# Altium PCB Peripheral_PCB.PcbDoc
Units mil, origin at the board's own origin, x right, y up, seen from the top; angles counter-clockwise.
Board outline 5140 x 3120 mil, 2 copper layers (Top Layer, Bottom Layer), stack 5.6 mil thick; 54 components, 55 nets, 284 pads, 5 vias.
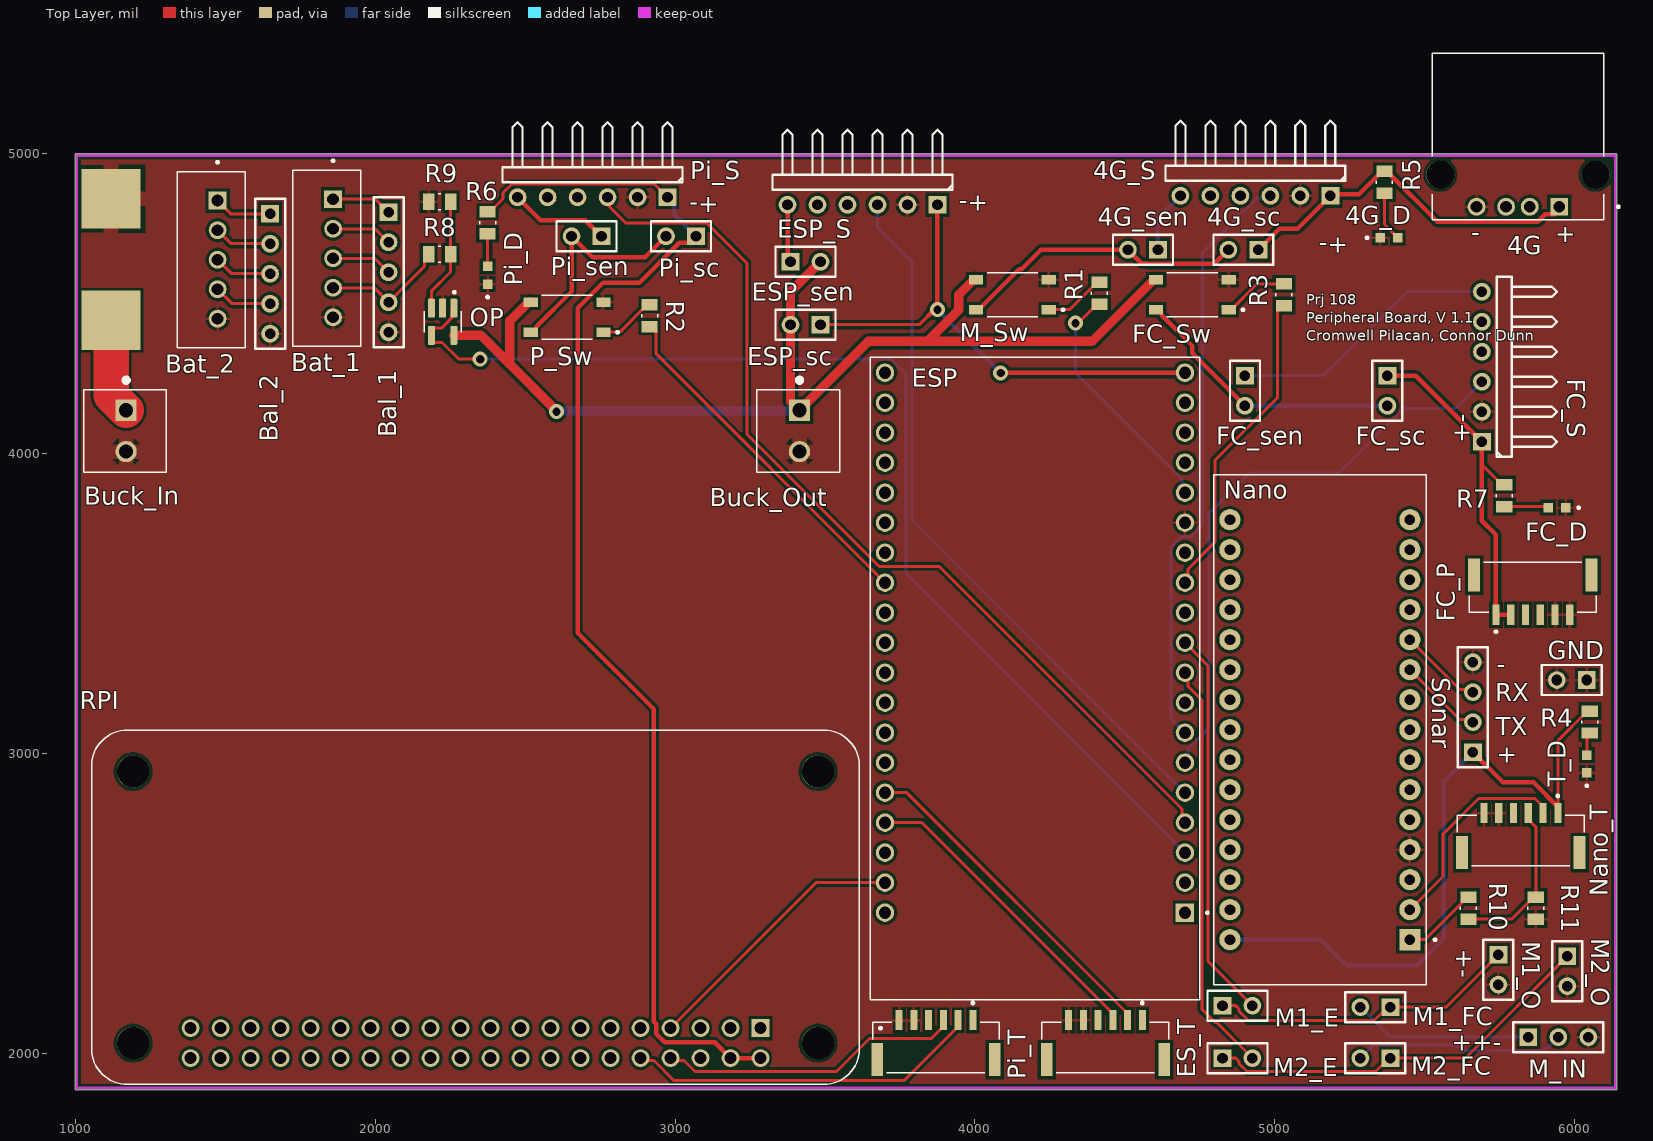
[diagram p0: Top Layer view]
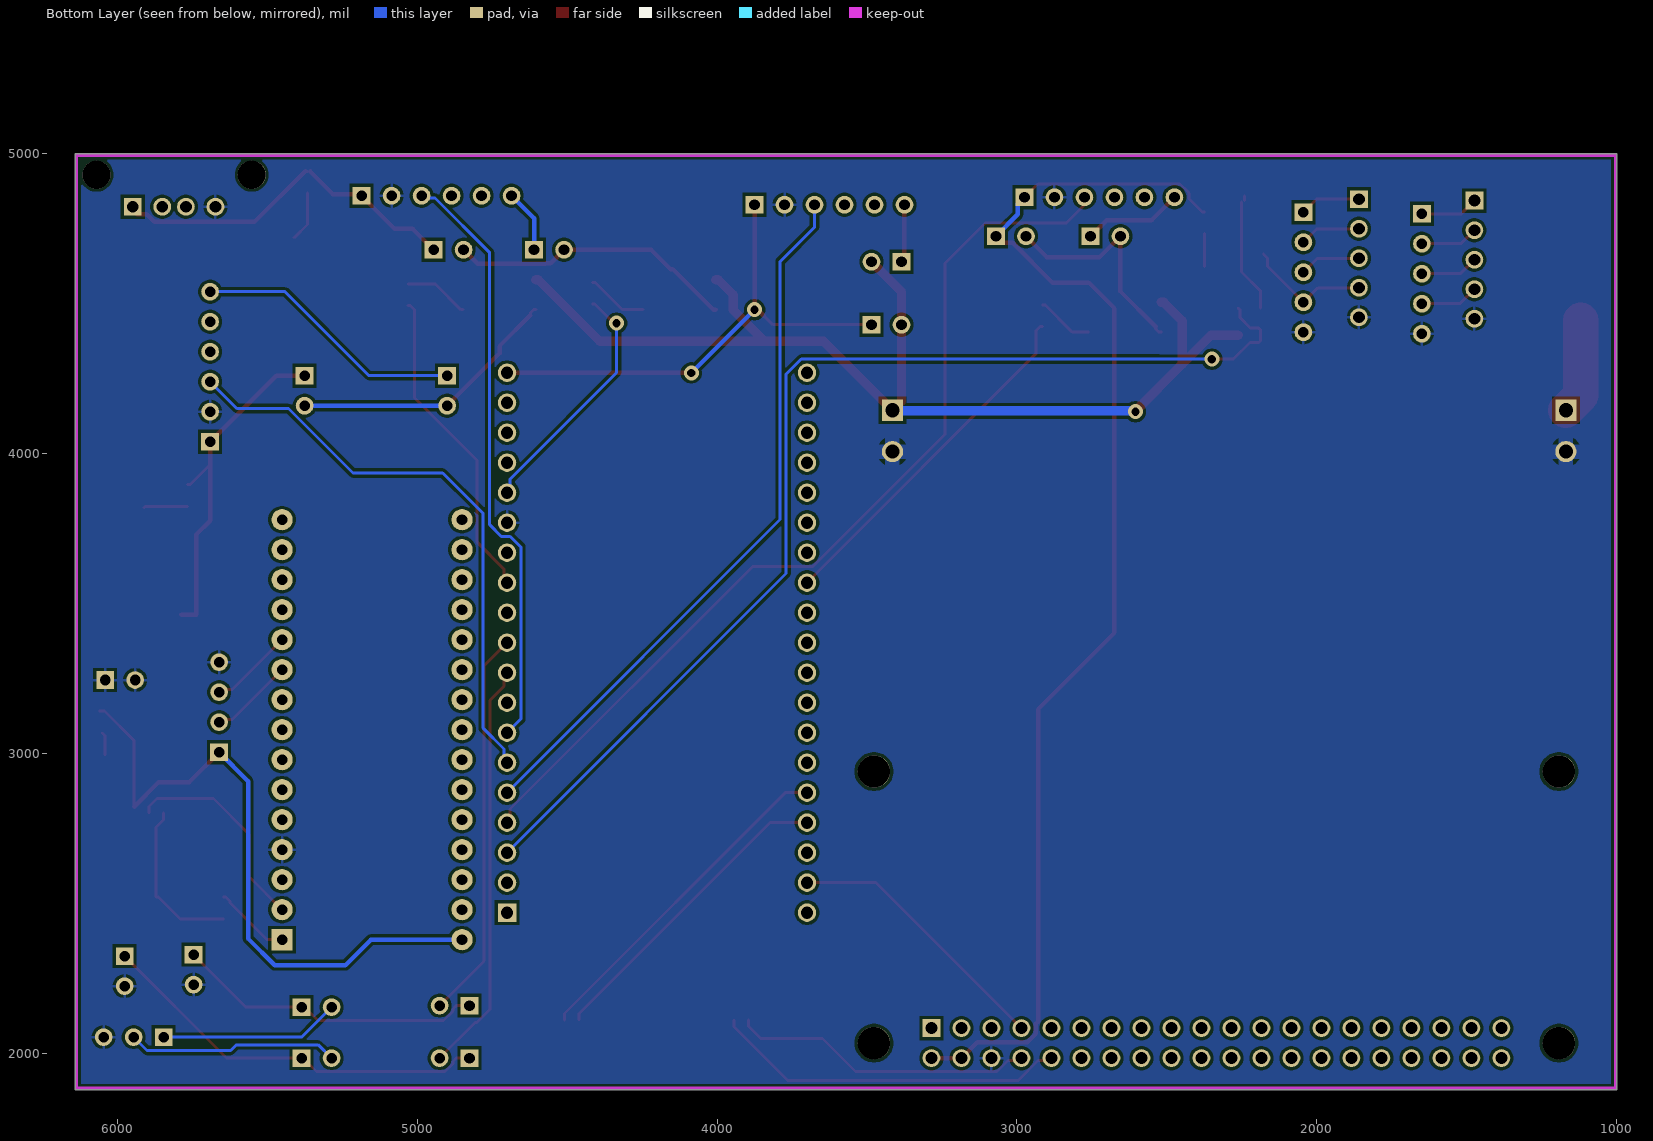
[diagram p1: Bottom Layer view, seen from below]
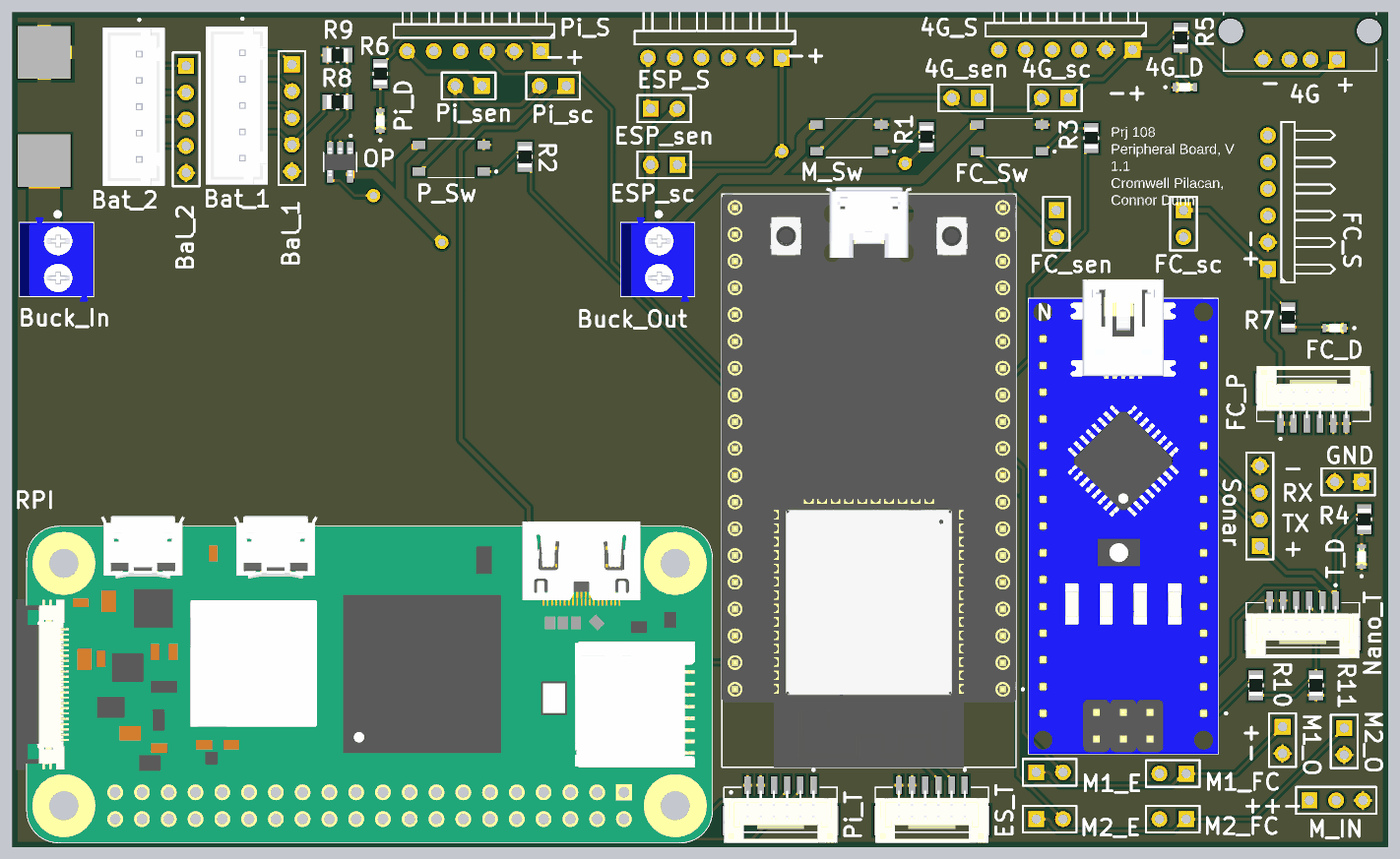
[diagram p2: 3D render of the assembled board from above, using the file's embedded part models]

## Layer stack, top to bottom
Top Solder: solder mask 0.4, Solder Resist, Dk 3.5
Top Layer: signal copper 1.4
Dielectric 3: prepreg 2.8, PP-006, Dk 4.1
Bottom Layer: signal copper 1.4
Bottom Solder: solder mask 0.4, Solder Resist, Dk 3.5

## Board outline
1000,1880 6140,1880 6140,5000 1000,5000

## Design rules (kind name [scope] priority, off if disabled: settings)
Clearance [All] p1: gap=10 ignorepadtopadclearanceinfootprint=FALSE
PlaneConnect [InNet('GND')] p1: planeconnectstyle=Relief reliefexpansion=50 reliefentries=4 reliefconductorwidth=10 reliefairgap=15
PolygonConnect [All] p1: connectstyle=Relief reliefconductorwidth=10 reliefentries=4 polygonreliefangle="90 Angle" airgapwidth=10
RoutingVias [All] p1: holewidth=28 width=50 viastyle="Through Hole" minholewidth=28 minwidth=50 maxholewidth=28 maxwidth=50
SolderMaskExpansion [All] p1: expansion=4 istentingtop=FALSE
SupplyNets "Schematic Supply Nets_1" [InNet('GND')] p1: voltage=0.000
SupplyNets "Schematic Supply Nets" [InNet('VBATT')] p2: voltage=0.000
Width [All] p1: maxlimit=118.11 minlimit=10 preferedwidth=10 bottomlayer_maxwidth=31.5 minimp=50.000000 maximp=50.000000 favimp=50.000000
29 further rules are at their usual default settings.

## Components (designator, comment, footprint, x,y, rotation, side; value= is the part's Value field where it differs from the comment)
4G "USB-A1HSW6" OST_USB-A1HSW6 5810,4930 r180 top
4G_D "SM0603UYC" LED_SM0603UYC 5380,4720 r0 top
4G_S "Header 6H" HDR1X6H 5185,4860 r180 top
4G_sc "Header 2" HDR1X2 4945,4680 r180 top
4G_sen "Header 2" HDR1X2 4610,4680 r180 top
Bal_1 "Header 5" HDR1X5 2045,4805 r270 top
Bal_2 "Header 5" HDR1X5 1650,4800 r270 top
Bat_1 "B5B-XH-A" JST_B5B-XH-A 1839.33,4651.57 r90 top
Bat_2 "B5B-XH-A" JST_B5B-XH-A 1454.33,4646.85 r90 top
Buck_In "1776275-2" TE_1776275-2 1170,4145 r270 top (schematic designator Buck_IN)
Buck_Out "1776275-2" TE_1776275-2 3415,4145 r270 top (schematic designator Buck_OUT)
ES_T "BM06B-GHS-TBT(LF)(SN)(N)" JST_BM06B-GHS-TBT(LF)(SN)(N) 4435,1980 r0 top
ESP "ESP32-DEVKITC-32D" MODULE_ESP32-DEVKITC-32D 4200,3247.95 r180 top
ESP_S "Header 6H" HDR1X6H 3875,4830 r180 top
ESP_sc "Header 2" HDR1X2 3485,4430 r180 top
ESP_sen "Header 2" HDR1X2 3385,4640 r0 top
FC_D "SM0603UYC" LED_SM0603UYC 5940,3820 r180 top
FC_P "BM06B-GHS-TBT(LF)(SN)(N)" JST_BM06B-GHS-TBT(LF)(SN)(N) 5860,3595 r180 top
FC_S "Header 6H" HDR1X6H 5690,4040 r90 top
FC_sc "Header 2" HDR1X2 5375,4260 r270 top
FC_sen "Header 2" HDR1X2 4900,4260 r270 top
FC_Sw "G3VM-61VY3" RELAY_G3VM-61VY3 4725,4530 r180 top
GND "Header 2" HDR1X2 6040,3245.47 r180 top
M1_E "Header 2" HDR1X2 4825,2160 r0 top
M1_FC "Header 2" HDR1X2 5385,2155 r180 top
M1_O "Header 2" HDR1X2 5745,2330 r270 top
M2_E "Header 2" HDR1X2 4825,1985 r0 top
M2_FC "Header 2" HDR1X2 5385,1985 r180 top
M2_O "Header 2" HDR1X2 5975,2325 r270 top
M_IN "Header 3" HDR1X3 5845,2055 r0 top
M_Sw "G3VM-61VY3" RELAY_G3VM-61VY3 4125,4530 r180 top
Nano "ARDUINO_NANO" MODULE_ARDUINO_NANO 5150,3080 r180 top
Nano_T "BM06B-GHS-TBT(LF)(SN)(N)" JST_BM06B-GHS-TBT(LF)(SN)(N) 5820,2670 r0 top
OP "MCP6001T-I/OT" SOT95P270X145-5N 2225,4440 r270 top
P_Sw "G3VM-61VY3" RELAY_G3VM-61VY3 2640,4455 r180 top
Pi_D "SM0603UYC" LED_SM0603UYC 2375,4595 r90 top
Pi_S "Header 6H" HDR1X6H 2975,4855 r180 top
Pi_sc "Header 2" HDR1X2 3070,4725 r180 top
Pi_sen "Header 2" HDR1X2 2755,4725 r180 top
Pi_T "BM06B-GHS-TBT(LF)(SN)(N)" JST_BM06B-GHS-TBT(LF)(SN)(N) 3870,1980 r0 top
R1 "CR0805AJ/-000EAS" RESC2012X60N 4415,4535 r270 top
R2 "CR0805AJ/-000EAS" RESC2012X60N 2915,4460 r270 top
R3 "CR0805AJ/-000EAS" RESC2012X60N 5030,4530 r270 top
R4 "CR0805AJ/-000EAS" RESC2012X60N 6050,3105.47 r90 top
R5 "CR0805AJ/-000EAS" RESC2012X60N 5365,4905 r90 top
R6 "CR0805AJ/-000EAS" RESC2012X60N 2375,4770 r90 top
R7 "CR0805AJ/-000EAS" RESC2012X60N 5765,3860 r90 top
R8 "CR0805AJ/-000EAS" RESC2012X60N 2215,4665 r0 top
R9 "CR0805AJ/-000EAS" RESC2012X60N 2215,4840 r180 top
R10 "CR0805AJ/-000EAS" RESC2012X60N 5645,2485 r270 top
R11 "CR0805AJ/-000EAS" RESC2012X60N 5870,2485 r270 top
RPI "RASPBERRY_PI_ZERO_2_W" MODULE_RASPBERRY_PI_ZERO_2_W 2335,2487.76 r180 top
Sonar "Header 4" HDR1X4 5660,3005 r90 top
T_D "SM0603UYC" LED_SM0603UYC 6040,2965.47 r90 top

## Footprints (in the part's own frame and the unit in brackets; to place one, negate y for a bottom-side part, rotate by r counter-clockwise, add the part's x,y. Pads: shape width x height; smd on the part's side, far side on the other; paste and mask are expansions set on the pad)
HDR1X2 [mm] "Connector; Header; 2 Position"
  rect 1.5x1.5 hole 0.9: 1(0,0)
  round 1.5 hole 0.9: 2(2.54,0)
  silkscreen extent -1.27,-1.27 3.81,1.27
HDR1X3 [mm] "Connector; Header; 3 Position"
  rect 1.5x1.5 hole 0.9: 1(0,0)
  round 1.5 hole 0.9: 2(2.54,0) 3(5.08,0)
  silkscreen extent -1.27,-1.27 6.35,1.27
HDR1X4 [mm] "Connector; Header; 4 Position"
  rect 1.5x1.5 hole 0.9: 1(0,0)
  round 1.5 hole 0.9: 2(2.54,0) 3(5.08,0) 4(7.62,0)
  silkscreen extent -1.27,-1.27 8.89,1.27
HDR1X5 [mm] "Connector; Header; 5 Position"
  rect 1.5x1.5 hole 0.9: 1(0,0)
  round 1.5 hole 0.9: 2(2.54,0) 3(5.08,0) 4(7.62,0) 5(10.16,0)
  silkscreen extent -1.27,-1.27 11.43,1.27
HDR1X6H [mm] "Connector; Header; 6 Position; Right Angle"
  rect 1.5x1.5 hole 0.9: 1(0,0)
  round 1.5 hole 0.9: 2(2.54,0) 3(5.08,0) 4(7.62,0) 5(10.16,0) 6(12.7,0)
  silkscreen extent -1.27,-6.35 13.97,-1.27
JST_B5B-XH-A [mm]
  rect 1.508x1.508 / inner round 1.508 / far side rect 1.508x1.508 hole 1: 1(5,-0.525)
  round 1.508 hole 1: 2(2.5,-0.525) 3(0,-0.525) 4(-2.5,-0.525) 5(-5,-0.525)
  silkscreen extent -7.45,-2.88 8.35,2.88, body extent -7.45,-2.88 7.45,2.88, height 7
JST_BM06B-GHS-TBT(LF)(SN)(N) [mm]
  rect 0.6x1.7 smd: 1(3.125,3.35) 2(1.875,3.35) 3(0.625,3.35) 4(-0.625,3.35) 5(-1.875,3.35) 6(-3.125,3.35)
  rect 1x2.8 smd: S1(-4.975,0) S2(4.975,0)
  silkscreen extent -5.38,-1.1 5.38,4.9, body extent -5.38,-2.12 5.38,2.83, height 4.15
LED_SM0603UYC [mm]
  rect 0.8x0.8 smd: A(0.75,0) C(-0.75,0)
  silkscreen extent -1.95,-0.1 -1.75,0.1, body extent -0.8,-0.4 0.8,0.4, height 0.6
MODULE_ARDUINO_NANO [mm]
  rect 1.8x1.8 / inner round 1.8 / far side rect 1.8x1.8 hole 0.9: 1(-7.62,17.78)
  round 1.8 hole 0.9: 2(-7.62,15.24) 3(-7.62,12.7) 4(-7.62,10.16) 5(-7.62,7.62) 6(-7.62,5.08) 7(-7.62,2.54) 8(-7.62,0) 9(-7.62,-2.54) 10(-7.62,-5.08) 11(-7.62,-7.62) 12(-7.62,-10.16) 13(-7.62,-12.7) 14(-7.62,-15.24) 15(-7.62,-17.78) 16(7.62,-17.78) 17(7.62,-15.24) 18(7.62,-12.7) 19(7.62,-10.16) 20(7.62,-7.62) 21(7.62,-5.08) 22(7.62,-2.54) 23(7.62,0) 24(7.62,2.54) 25(7.62,5.08) 26(7.62,7.62) 27(7.62,10.16) 28(7.62,12.7) 29(7.62,15.24) 30(7.62,17.78)
  silkscreen extent -9.85,-21.6 9,21.6, body extent -9,-23.4 9,21.6, height 12.6
MODULE_ESP32-DEVKITC-32D [mm]
  rect 1.56x1.56 / inner round 1.56 / far side rect 1.56x1.56 hole 1.04: J2-1(-12.7,19.76)
  round 1.56 hole 1.04: J2-2(-12.7,17.22) J2-3(-12.7,14.68) J2-4(-12.7,12.14) J2-5(-12.7,9.6) J2-6(-12.7,7.06) J2-7(-12.7,4.52) J2-8(-12.7,1.98) J2-9(-12.7,-0.56) J2-10(-12.7,-3.1) J2-11(-12.7,-5.64) J2-12(-12.7,-8.18) J2-13(-12.7,-10.72) J2-14(-12.7,-13.26) J2-15(-12.7,-15.8) J2-16(-12.7,-18.34) J2-17(-12.7,-20.88) J2-18(-12.7,-23.42) J2-19(-12.7,-25.96) J3-1(12.7,19.76) J3-2(12.7,17.22) J3-3(12.7,14.68) J3-4(12.7,12.14) J3-5(12.7,9.6) J3-6(12.7,7.06) J3-7(12.7,4.52) J3-8(12.7,1.98) J3-9(12.7,-0.56) J3-10(12.7,-3.1) J3-11(12.7,-5.64) J3-12(12.7,-8.18) J3-13(12.7,-10.72) J3-14(12.7,-13.26) J3-15(12.7,-15.8) J3-16(12.7,-18.34) J3-17(12.7,-20.88) J3-18(12.7,-23.42) J3-19(12.7,-25.96)
  silkscreen extent -14.7,-27.25 13.95,27.15, body extent -13.97,-27.9 13.97,27.2, height 6.69
MODULE_RASPBERRY_PI_ZERO_2_W [mm]
  rect 1.508x1.508 / inner round 1.508 / far side rect 1.508x1.508 hole 1: 1(-24.13,10.23)
  round 1.508 hole 1: 2(-24.13,12.77) 3(-21.59,10.23) 4(-21.59,12.77) 5(-19.05,10.23) 6(-19.05,12.77) 7(-16.51,10.23) 8(-16.51,12.77) 9(-13.97,10.23) 10(-13.97,12.77) 11(-11.43,10.23) 12(-11.43,12.77) 13(-8.89,10.23) 14(-8.89,12.77) 15(-6.35,10.23) 16(-6.35,12.77) 17(-3.81,10.23) 18(-3.81,12.77) 19(-1.27,10.23) 20(-1.27,12.77) 21(1.27,10.23) 22(1.27,12.77) 23(3.81,10.23) 24(3.81,12.77) 25(6.35,10.23) 26(6.35,12.77) 27(8.89,10.23) 28(8.89,12.77) 29(11.43,10.23) 30(11.43,12.77) 31(13.97,10.23) 32(13.97,12.77) 33(16.51,10.23) 34(16.51,12.77) 35(19.05,10.23) 36(19.05,12.77) 37(21.59,10.23) 38(21.59,12.77) 39(24.13,10.23) 40(24.13,12.77)
  round 2.75 hole 2.75 unplated: ""(-29,-11.5) ""(-29,11.5) ""(29,-11.5) ""(29,11.5)
  silkscreen extent -34.39,-15 32.5,15, body extent -32.5,-16 33.5,15, height 4.57
OST_USB-A1HSW6 [mm]
  rect 1.508x1.508 / inner round 1.508 / far side rect 1.508x1.508 hole 1: 1(-3.5,2.71)
  round 1.508 hole 1: 2(-1,2.71) 3(1,2.71) 4(3.5,2.71)
  round 2.38 hole 2.38 unplated: ""(-6.57,0) ""(6.57,0)
  silkscreen extent -8.61,-10.3 7.25,3.8
RELAY_G3VM-61VY3 [mm]
  rect 1.2x0.8 smd: 1(-3.075,1.27) 2(-3.075,-1.27) 3(3.075,-1.27) 4(3.075,1.27)
  silkscreen extent -4.38,-1.85 2.15,1.85
RESC2012X60N [mm]
  rect 0.97x1.38 smd: 1(-0.93,0) 2(0.93,0)
  silkscreen extent -0.12,-0.68 0.12,0.68, body extent -1,-0.63 1,0.63, height 0.6
SOT95P270X145-5N [mm]
  rrect25% 1.61x0.59 smd: 1(-1.145,0.95) 2(-1.145,0) 3(-1.145,-0.95) 4(1.145,-0.95) 5(1.145,0.95)
  silkscreen extent -2.6,-1.57 0.9,1.57, body extent -1.35,-1.45 1.35,1.45, height 1.45
TE_1776275-2 [mm]
  rect 1.8x1.8 / inner round 1.8 / far side rect 1.8x1.8 hole 1.2: 1(0,0)
  round 1.8 hole 1.2: 2(3.5,0)
  silkscreen extent -2.74,-3.6 5.25,3.4, body extent -2.25,-3.6 5.75,3.4, height 8.3

## Part data
4G FC_Sw M_Sw P_Sw: Package=None, Availability=Unavailable, Price=None
  4G: MF="{'manufacturer': u'On Shore Technology Inc.'}", MP=USB-A1HSW6
  FC_Sw M_Sw P_Sw: MP=G3VM-61VY3
4G_D FC_D Pi_D T_D: "LED SMD 0603 Ultra Yellow 593nm 70mcd Water Clear Lens 130 Deg Viewing Angle", Package="0603 Bivar", Check_prices=https://www.snapeda.com/parts/SM0603UYC/Bivar/view-part/?ref=eda, MF=Bivar, MP=SM0603UYC, SnapEDA_Link=https://www.snapeda.com/parts/SM0603UYC/Bivar/view-part/?ref=snap
4G_S ESP_S FC_S Pi_S: "Header, 6-Pin, Right Angle", LatestRevisionDate=17-Jul-2002, LatestRevisionNote="Re-released for DXP Platform.", Publisher="Altium Limited"
4G_sc 4G_sen ESP_sc ESP_sen FC_sc FC_sen GND M1_E M1_FC M1_O M2_E M2_FC M2_O Pi_sc Pi_sen: "Header, 2-Pin", LatestRevisionDate=17-Jul-2002, LatestRevisionNote="Re-released for DXP Platform.", Publisher="Altium Limited"
Bal_1 Bal_2: "Header, 5-Pin", LatestRevisionDate=17-Jul-2002, LatestRevisionNote="Re-released for DXP Platform.", Publisher="Altium Limited"
Bat_1 Bat_2: "Connector Header Through Hole 5 position 0.098 (2.50mm)", Package=None, Check_prices=https://www.snapeda.com/parts/B5B-XH-A/JST+Sales+America+Inc./view-part/?ref=eda, MF="JST Sales", MP=B5B-XH-A, SnapEDA_Link=https://www.snapeda.com/parts/B5B-XH-A/JST+Sales+America+Inc./view-part/?ref=snap
Buck_In Buck_Out: "2 Position Wire to Board Terminal Block Horizontal with Board 0.138\" (3.50mm) Through Hole", Package=None, Availability=Unavailable, Check_prices=https://www.snapeda.com/parts/1776275-2/TE+Connectivity+AMP+Connectors/view-part/?ref=eda, MF="TE Connectivity", MP=1776275-2, Price=None, SnapEDA_Link=https://www.snapeda.com/parts/1776275-2/TE+Connectivity+AMP+Connectors/view-part/?ref=snap
ES_T FC_P Nano_T Pi_T: "Connector Header Surface Mount 6 position 0.049 (1.25mm)", Package=None, Check_prices=https://www.snapeda.com/parts/BM06B-GHS-TBT(LF)(SN)(N)/JST/view-part/?ref=eda, MF="JST Sales", MP=BM06B-GHS-TBT(LF)(SN)(N), SnapEDA_Link=https://www.snapeda.com/parts/BM06B-GHS-TBT(LF)(SN)(N)/JST/view-part/?ref=snap
ESP: "WiFi Development Tools (802.11) ESP32 General Development Kit, ESP32-WROOM-32D on the board", Package=None, Check_prices=https://www.snapeda.com/parts/ESP32-DEVKITC-32D/Espressif+Systems/view-part/?ref=eda, MF="Espressif Systems", MP=ESP32-DEVKITC-32D, SnapEDA_Link=https://www.snapeda.com/parts/ESP32-DEVKITC-32D/Espressif+Systems/view-part/?ref=snap
M_IN: "Header, 3-Pin", LatestRevisionDate=17-Jul-2002, LatestRevisionNote="Re-released for DXP Platform.", Publisher="Altium Limited"
Nano: "Small, complete, and breadboard-friendly board based on the ATmega328 (Arduino Nano 3.x)", Package="Non-Standard Arduino", Check_prices=https://www.snapeda.com/parts/Arduino%20Nano/Arduino/view-part/?ref=eda, MF=Arduino, MP="Arduino Nano", SnapEDA_Link=https://www.snapeda.com/parts/Arduino%20Nano/Arduino/view-part/?ref=snap
OP: "Microchip Op Amp, 1MHz CMOS, Rail to Rail, 3 V, 5 V, 5-Pin SOT-23", Package="SOT-23 Microchip", Check_prices=https://www.snapeda.com/parts/MCP6001T-I/OT/Microchip/view-part/?ref=eda, MF=Microchip, MP=MCP6001T-I/OT, SnapEDA_Link=https://www.snapeda.com/parts/MCP6001T-I/OT/Microchip/view-part/?ref=snap
R1 R2 R3 R4 R5 R6 R7 R8 R9 R10 R11: "Resistor, AS 0805 0R Jumper 125mW, AEC-Q, Anti-Sulfur", Package="0805 Bourns", Check_prices=https://www.snapeda.com/parts/CR0805AJ/-000EAS/Bourns/view-part/?ref=eda, MF=Bourns, MP=CR0805AJ/-000EAS, SnapEDA_Link=https://www.snapeda.com/parts/CR0805AJ/-000EAS/Bourns/view-part/?ref=snap
RPI: "At the heart of Raspberry Pi Zero 2 W is RP3A0, a custom-built system-in-package designed by Raspberry Pi in the UK.", Package=None, Check_prices=https://www.snapeda.com/parts/RASPBERRY%20PI%20ZERO%202%20W/Raspberry+Pi/view-part/?ref=eda, MF="Raspberry Pi", MP="RASPBERRY PI ZERO 2 W", SnapEDA_Link=https://www.snapeda.com/parts/RASPBERRY%20PI%20ZERO%202%20W/Raspberry+Pi/view-part/?ref=snap
Sonar: "Header, 4-Pin", LatestRevisionDate=17-Jul-2002, LatestRevisionNote="Re-released for DXP Platform.", Publisher="Altium Limited"

## Free pads (board coordinates)
  rect 196.85x196.85 smd mask+4: ""(1120,4445) ""(1120,4850)

## Via types
v1: diameter 50, hole 28, Top Layer to Bottom Layer, 5 vias

## Nets (pads, with @x,y where several pads share a name; then routed paths per layer and width w, separated by ;. In a path a pad name is that pad's centre, name@x,y a point inside that pad or via, vN(x,y) a via of type N, cw(c..) or ccw(c..) an arc to the next point about the centre after c; other vN are vias at no path point)
4G_5V: 4G.1 4G_S.1 4G_sc.1 R5.2 | length 1199.8
  Top Layer w10: R5.2 R5.2@5373.07,4941.61
  Top Layer w15: 4G_sc.1 5015,4750 5075,4750 4G_S.1 5190,4865 5280.31,4865 R5.2@5356.93,4941.61 ; R5.2@5373.07,4941.61 5541.87,4772.81 5876.12,4772.81 5901.12,4797.81 5932.81,4797.81 4G.1@5955,4820
4G_ADC: 4G_S.3 ESP.J2-7 | length 1984.8
  Bottom Layer w10: ESP.J2-7 4654.29,3115.71 4654.29,3688.93 4689.65,3724.29 4718.93,3724.29 4757.98,3763.34 4757.98,4670.01 4940.47,4852.5 4977.5,4852.5 4G_S.3
4G_jump: 4G_sc.2 4G_sen.2 M_Sw.4 | length 962.9
  Top Layer w15: M_Sw.4 4011.81,4480 4146.81,4615 4155,4615 4220,4680 4G_sen.2 4554.53,4635.47 4570.72,4635.47 4573.22,4632.97 4797.97,4632.97 4G_sc.2
4G_sense: 4G_S.6 4G_sen.1 | length 211.1
  Bottom Layer w15: 4G_sen.1 4610,4785 4G_S.6
5V: Buck_Out.1 ESP_sc.2 ESP_sen.2 FC_Sw.3 M_Sw.3 OP.5 P_Sw.3 | length 3696.4
  Top Layer w10: Buck_Out.1@3385,4175 Buck_Out.1
  Top Layer w31.5: OP.5 2352.64,4394.92 2448.78,4298.78 ; P_Sw.3 2511.06,4505 2448.78,4442.72 2448.78,4298.78 ; v1(2605,4140) 2605,4142.56 2448.78,4298.78 ; Buck_Out.1@3385,4175 ESP_sc.2 3385,4540 ESP_sen.2 ; Buck_Out.1 3645,4375 3841.77,4375 ; M_Sw.3 3996.06,4580 3946.04,4529.98 3946.04,4479.27 3841.77,4375 ; FC_Sw.3 4596.06,4580 4391.06,4375 3841.77,4375
  Bottom Layer w31.5: v1(2605,4140) 2607.5,4142.5 3412.5,4142.5 Buck_Out.1
A_Rx: Nano.2 Nano_T.2 | length 712.8
  Top Layer w10: Nano.2 5560.3,2590.3 5560.3,2731.71 5678.94,2850.35 5867.01,2850.35 5893.82,2823.54 Nano_T.2
A_Tx: Nano_T.3 R10.2 R11.1 | length 546.1
  Top Layer w10: R10.2 5788.7,2448.39 5861.93,2521.61 R11.1 5870,2754.84 5844.61,2780.24 Nano_T.3
A_Txs: Nano.1 R10.1 | length 256.7
  Top Layer w10: Nano.1 5500.43,2380 5622.83,2502.4 5622.83,2507.52 5636.93,2521.61 R10.1
B11: Bal_1.4 Bat_1.4 R8.1 | length 420.2
  Top Layer w10: Bat_1.4 1996.85,4553.15 Bal_1.4 2164.29,4624.29 2164.29,4650.91 R8.1
B12: Bal_1.3 Bat_1.3 | length 204.3
  Top Layer w10: Bat_1.3 1998.43,4651.57 Bal_1.3
B13: Bal_1.2 Bat_1.2 | length 203.6
  Top Layer w10: Bat_1.2 2000,4750 Bal_1.2
B14: Bal_1.1 Bat_1.1 | length 203
  Top Layer w10: Bat_1.1 2001.57,4848.43 Bal_1.1
B21: Bal_2.4 Bat_2.4 | length 195.1
  Top Layer w10: Bat_2.4 1523.43,4500 Bal_2.4
B22: Bal_2.3 Bat_2.3 | length 194.4
  Top Layer w10: Bat_2.3 1521.85,4600 Bal_2.3
B23: Bal_2.2 Bat_2.2 | length 193.8
  Top Layer w10: Bat_2.2 1520.28,4700 Bal_2.2
B24: Bal_2.1 Bat_2.1 | length 193.1
  Top Layer w10: Bat_2.1 1518.7,4800 Bal_2.1
B_Divider: OP.3 R8.2 R9.1 | length 396.4
  Top Layer w10: OP.3 2187.6,4541.99 2251.61,4606 R8.2 R9.1 ; R9.1@2241.61,4845 R9.1@2241.61,4860
Battery_ADC: ESP.J2-3 OP.1 OP.4 | length 3764
  Top Layer w10: OP.1 2255.79,4478.46 2255.79,4453.05 2221.45,4418.71 2194.21,4418.71 2187.6,4412.1 OP.4 2187.6,4377.75 2194.21,4371.13 2223.37,4371.13 2279.5,4315 v1(2350,4315)
  Bottom Layer w10: v1(2350,4315) 2525,4315 2525.71,4315.71 3718.93,4315.71 3769.69,4264.95 3769.69,3600.31 ESP.J2-3
ESP_5V: ESP.J2-19 ESP_S.1 ESP_sc.1 | length 1673.4
  Top Layer w10: ESP_sc.1 3814.18,4430 3844.18,4460 ; v1@3864.18,4480 v1(3875,4480) ; v1(4085.86,4269.14) v1@4086.29,4269.57 ; ESP.J2-19@4699.57,4269.57 ESP.J2-19
  Top Layer w15: 3844.18,4460 v1@3864.18,4480 ; v1(3875,4480) ESP_S.1 ; v1@4086.29,4269.57 ESP.J2-19@4699.57,4269.57
  Bottom Layer w15: v1(3875,4480) v1(4085.86,4269.14)
ESP_ADC: ESP.J2-5 ESP_S.3 | length 2384.6
  Bottom Layer w10: ESP_S.3 3675,4755 3789.69,4640.31 3789.69,3780.31 ESP.J2-5
ESP_Rx: ES_T.2 ESP.J3-5 | length 1135.5
  Top Layer w10: ESP.J3-5 3772.36,2870 4508.82,2133.54 ES_T.2
ESP_sense: ESP_S.6 ESP_sen.1 | length 194.1
  Top Layer w10: ESP_sen.1@3375,4650 ESP_sen.1
  Top Layer w15: ESP_sen.1@3375,4650 ESP_S.6
ESP_Tx: ES_T.3 ESP.J3-4 | length 1044.9
  Top Layer w10: ESP.J3-4 3823.15,2770 4459.61,2133.54 ES_T.3
FC_5V: FC_P.1 FC_P.2 FC_S.1 FC_sc.1 R7.2 | length 1230.9
  Top Layer w10: FC_S.1 5690,3963.54 5756.93,3896.61 R7.2
  Top Layer w15: FC_sc.1 5470,4260 FC_S.1 5690,3777.01 5736.97,3730.04 FC_P.1 FC_P.2
FC_ADC: ESP.J2-6 FC_S.3 | length 1956.2
  Bottom Layer w10: ESP.J2-6 4709.84,2979.84 4709.84,3015.2 4779.57,3084.93 4779.57,3800.89 4914.43,3935.75 5213.72,3935.75 5428.72,4150.75 5600.75,4150.75 FC_S.3
FC_High: FC_Sw.1 R3.1 | length 219.8
  Top Layer w10: FC_Sw.1 4853.94,4480 4940.55,4566.61 R3.1
FC_jump: FC_sc.2 FC_sen.2 FC_Sw.4 | length 922.2
  Top Layer w10: FC_Sw.4 4611.81,4480 4622.56,4469.25 4622.56,4461.38
  Top Layer w15: 4622.56,4461.38 4725,4358.94 4725,4335 FC_sen.2
  Bottom Layer w15: FC_sen.2 FC_sc.2
FC_sense: FC_S.6 FC_sen.1 | length 906
  Bottom Layer w10: FC_sen.1 5160.63,4260 5440.63,4540 FC_S.6
GND: 4G.4 4G_D.C 4G_S.2 Bal_1.5 Bal_2.5 Bat_1.5 Bat_2.5 Buck_In.2 Buck_Out.2 ES_T.5 ES_T.6 ESP.J2-14 ESP_S.2 FC_D.C FC_P.5 FC_P.6 FC_S.2 FC_Sw.2 GND.1 GND.2 M1_O.2 M2_O.2 M_IN.3 M_Sw.2 Nano.4 Nano_T.5 Nano_T.6 OP.2 P_Sw.2 pad.@1120,4850 Pi_D.C Pi_S.2 Pi_T.5 Pi_T.6 R9.2 R11.2 RPI.6 Sonar.4 T_D.C
Modem_High: M_Sw.1 R1.1 | length 206.9
  Top Layer w10: M_Sw.1 4315.31,4480 4406.93,4571.61 R1.1
Motor1_ESP: ESP.J2-10 M1_E.2 | length 1303.2
  Top Layer w10: ESP.J2-10 4776.93,3293.07 4776.93,2308.07 M1_E.2
Motor1_IN: M1_FC.2 M_IN.1 | length 601.4
  Bottom Layer w10: M1_FC.2 5385,2055 M_IN.1
Motor1_OUT: M1_E.1 M1_FC.1 M1_O.1 | length 1025.8
  Top Layer w10: M1_E.1 4869.53,2160 4880.47,2149.06 4880.47,2141.56 4911.56,2110.47 5330.47,2110.47 M1_FC.1@5375,2155 ; M1_FC.1 5570,2155 M1_O.1
Motor2_ESP: ESP.J2-9 M2_E.2 | length 1381.3
  Top Layer w10: ESP.J2-9 4709.84,3260.16 4709.84,3224.8 4756.93,3177.71 4756.93,2147.8 4801.79,2102.94 4807.06,2102.94 M2_E.2
Motor2_IN: M2_FC.2 M_IN.2 | length 710
  Bottom Layer w10: M2_FC.2@5280,1985 M2_FC.2@5285.27,1985 ; M2_FC.2 5329.53,2029.53 5602.24,2029.53 5621.3,2010.47 5900.47,2010.47 M_IN.2
Motor2_OUT: M2_E.1 M2_FC.1 M2_O.1 | length 1327.1
  Top Layer w10: M2_E.1 4869.53,1985 4880.47,1974.06 4880.47,1966.56 4906.56,1940.47 5335.47,1940.47 M2_FC.1@5380,1985 ; M2_FC.1 5635,1985 M2_O.1
Net4G_D_A: 4G_D.A R5.1 | length 166.8
  Top Layer w10: R5.1 5365,4764.53 4G_D.A
NetFC_D_A: FC_D.A R7.1 | length 146.9
  Top Layer w10: R7.1 5907.09,3823.39 FC_D.A
NetPi_D_A: Pi_D.A R6.1 | length 108.9
  Top Layer w10: Pi_D.A R6.1
NetR4_1: R4.1 T_D.A | length 78
  Top Layer w10: T_D.A 6040,3058.86 R4.1
Pi_5V: Pi_S.1 Pi_sc.1 R6.2 RPI.2 RPI.4 | length 4241
  Top Layer w10: R6.2 2383.07,4806.61 2426.86,4850.4 2426.86,4869.83 2456.56,4899.53 2930.47,4899.53 Pi_S.1
  Top Layer w15: Pi_sc.1 3047.97,4702.97 3014.48,4702.97 2881.51,4570 2760,4570 2675,4485 2675,3403.1 2929.69,3148.42 2929.69,2107.04 2937.81,2098.91 2937.81,2065.46 2965.46,2037.81 3132.19,2037.81 RPI.4 RPI.2
  Bottom Layer w15: Pi_S.1 2997.03,4832.97 2997.03,4797.97 Pi_sc.1
Pi_ADC: ESP.J2-4 Pi_S.3 | length 3132.8
  Top Layer w10: Pi_S.3@2775,4830 2835.47,4769.53 3105.74,4769.53 3239.55,4635.72 3239.55,4065.81 3681.07,3624.29 3881.07,3624.29 4690.16,2815.2 4690.16,2779.84 ESP.J2-4
Pi_High: P_Sw.1 R2.1 | length 191.9
  Top Layer w10: P_Sw.1 2815.31,4405 2906.93,4496.61 R2.1
Pi_jump: P_Sw.4 Pi_sc.2 Pi_sen.2 | length 754
  Top Layer w10: P_Sw.4 2526.81,4405 2537.56,4415.75 2537.56,4423.62
  Top Layer w15: 2537.56,4423.62 2655,4541.06 Pi_sen.2 2725,4655 2900,4655 Pi_sc.2
Pi_Rx: Pi_T.2 RPI.10 | length 1186.3
  Top Layer w10: RPI.10 2892.88,1977.12 2929.69,1977.12 2996.92,1909.88 3763.46,1909.88 3943.82,2090.24 Pi_T.2
Pi_sense: Pi_S.6 Pi_sen.1 | length 333.8
  Top Layer w15: Pi_S.6 2551.23,4778.77 2701.23,4778.77 Pi_sen.1
Pi_Shutdown: ESP.J3-2 RPI.7 | length 915.9
  Top Layer w10: RPI.7 3470,2570 ESP.J3-2
Pi_Tx: Pi_T.3 RPI.8 | length 1011.9
  Top Layer w10: RPI.8 2992.88,1977.12 3029.69,1977.12 3066.49,1940.31 3538.43,1940.31 3648.24,2050.12 3854.49,2050.12 3894.61,2090.24 Pi_T.3
Sonar_RX: Nano.11 Sonar.3 | length 287.1
  Top Layer w10: Nano.11 5615.61,3214.39 5650.61,3214.39 Sonar.3 Sonar.3@5655.43,3205
Sonar_TX: Nano.10 Sonar.2 | length 286.6
  Top Layer w10: Nano.10 5615.61,3114.39 5650.61,3114.39 Sonar.2 Sonar.2@5655.87,3105
Switch_FC: ESP.J2-12 R3.2 | length 1064.8
  Top Layer w10: ESP.J2-12 4709.84,3579.84 4709.84,3615.2 4799.57,3704.93 4799.57,3977.25 5007.83,4185.52 5007.83,4479.29 5021.93,4493.39 R3.2
Switch_Modem: ESP.J2-15 R1.2 | length 822.4
  Top Layer w10: v1(4335,4435) 4343.54,4435 4406.93,4498.39 R1.2
  Bottom Layer w10: v1(4335,4435) 4335,4270.36 4690.16,3915.2 4690.16,3879.84 ESP.J2-15
Switch_Pi: ESP.J3-12 R2.2 | length 1183.3
  Top Layer w10: R2.2 2923.07,4423.39 2937.17,4409.29 2937.17,4332.83 ESP.J3-12
Telem_5V: Nano.30 Nano_T.1 R4.2 Sonar.1 | length 2180.7
  Top Layer w10: Nano_T.1@5943.03,2823.54 5943.03,3043.19 6041.93,3142.09 R4.2 R4.2@6058.07,3142.09
  Top Layer w15: Sonar.1 5759.59,2905.41 5861.16,2905.41 Nano_T.1@5943.03,2823.54
  Bottom Layer w15: Nano.30 5153.84,2380 5238.84,2295 5475,2295 5563.56,2383.56 5563.56,2908.56 Sonar.1
VBATT: Buck_In.1 pad.@1120,4445 | length 320.7
  Top Layer w118.11: pad.@1120,4445 1120,4195 Buck_In.1
pads on no net: 4G. 4G.2 4G.3 4G_S.4 4G_S.5 ES_T.1 ES_T.4 ES_T.S1 ES_T.S2 ESP.J2-1 ESP.J2-2 ESP.J2-8 ESP.J2-11 ESP.J2-13 ESP.J2-16 ESP.J2-17 ESP.J2-18 ESP.J3-1 ESP.J3-3 ESP.J3-6 ESP.J3-7 ESP.J3-8 ESP.J3-9 ESP.J3-10 ESP.J3-11 ESP.J3-13 ESP.J3-14 ESP.J3-15 ESP.J3-16 ESP.J3-17 ESP.J3-18 ESP.J3-19 ESP_S.4 ESP_S.5 FC_P.3 FC_P.4 FC_P.S1 FC_P.S2 FC_S.4 FC_S.5 Nano.3 Nano.5 Nano.6 Nano.7 Nano.8 Nano.9 Nano.12 Nano.13 Nano.14 Nano.15 Nano.16 Nano.17 Nano.18 Nano.19 Nano.20 Nano.21 Nano.22 Nano.23 Nano.24 Nano.25 Nano.26 Nano.27 Nano.28 Nano.29 Nano_T.4 Nano_T.S1 Nano_T.S2 Pi_S.4 Pi_S.5 Pi_T.1 Pi_T.4 Pi_T.S1 Pi_T.S2 RPI. RPI.1 RPI.3 RPI.5 RPI.9 RPI.11 RPI.12 RPI.13 RPI.14 RPI.15 RPI.16 RPI.17 RPI.18 RPI.19 RPI.20 RPI.21 RPI.22 RPI.23 RPI.24 RPI.25 RPI.26 RPI.27 RPI.28 RPI.29 RPI.30 RPI.31 RPI.32 RPI.33 RPI.34 RPI.35 RPI.36 RPI.37 RPI.38 RPI.39 RPI.40

## Polygon pours and split planes (outlines as drawn)
GND on Bottom Layer "GND_L02_P003" (solid, remove dead copper, pour order 3): 1005,4995 6135,4995 6135,1890 1000,1890
GND on Top Layer "GND_L01_P002" (solid, remove dead copper, pour order 2): 1005,5000 6130,5000 6140,4990 6140,1890 1000,1890

## Keep-outs
Keep-Out Layer:
  lines w10: 1005,1885 1005,4995 6135,4995 6135,1885 1005,1885

## Silkscreen, mask and mechanical layers (free items; w line width, h text height)
Top Overlay:
  text "+-" at 4045,4860 h60 r180
  text "+-" at 3145,4855 h60 r180
  text "+-" at 5245,4720 h60 r180
  text "-" at 5655,4710.01 h60
  text "+" at 5935,4705 h60
  text "Prj 108 / Peripheral Board, V 1.1 / Cromwell Pilacan, Connor Dunn" at 5105,4365 h60
  text "+-" at 5650,4035 h60 r90
  text "-" at 5740,3270.01 h60
  text "RX" at 5735,3175 h60
  text "TX" at 5735.56,3060.95 h60
  text "+" at 5740,2970 h60
  text "+-" at 5605,2350 h60 r270
  text "++-" at 5590,2010 h60